# Altium PCB ART_CARD Rev 5.PcbDoc (part 13 of 13)
Units mil, origin at the board's own origin, x right, y up, seen from the top; angles counter-clockwise.
Board outline 6600.39 x 3903.54 mil, 8 copper layers (Top, Inner Layer 2, Inner Layer 3, Inner Layer 4, Inner Layer 5, Inner Layer 6, Inner Layer 7, Bottom), stack 63.111 mil thick; 542 components, 382 nets, 2410 pads, 1433 vias.
Unrouted connection lines stored in the file: 1247.
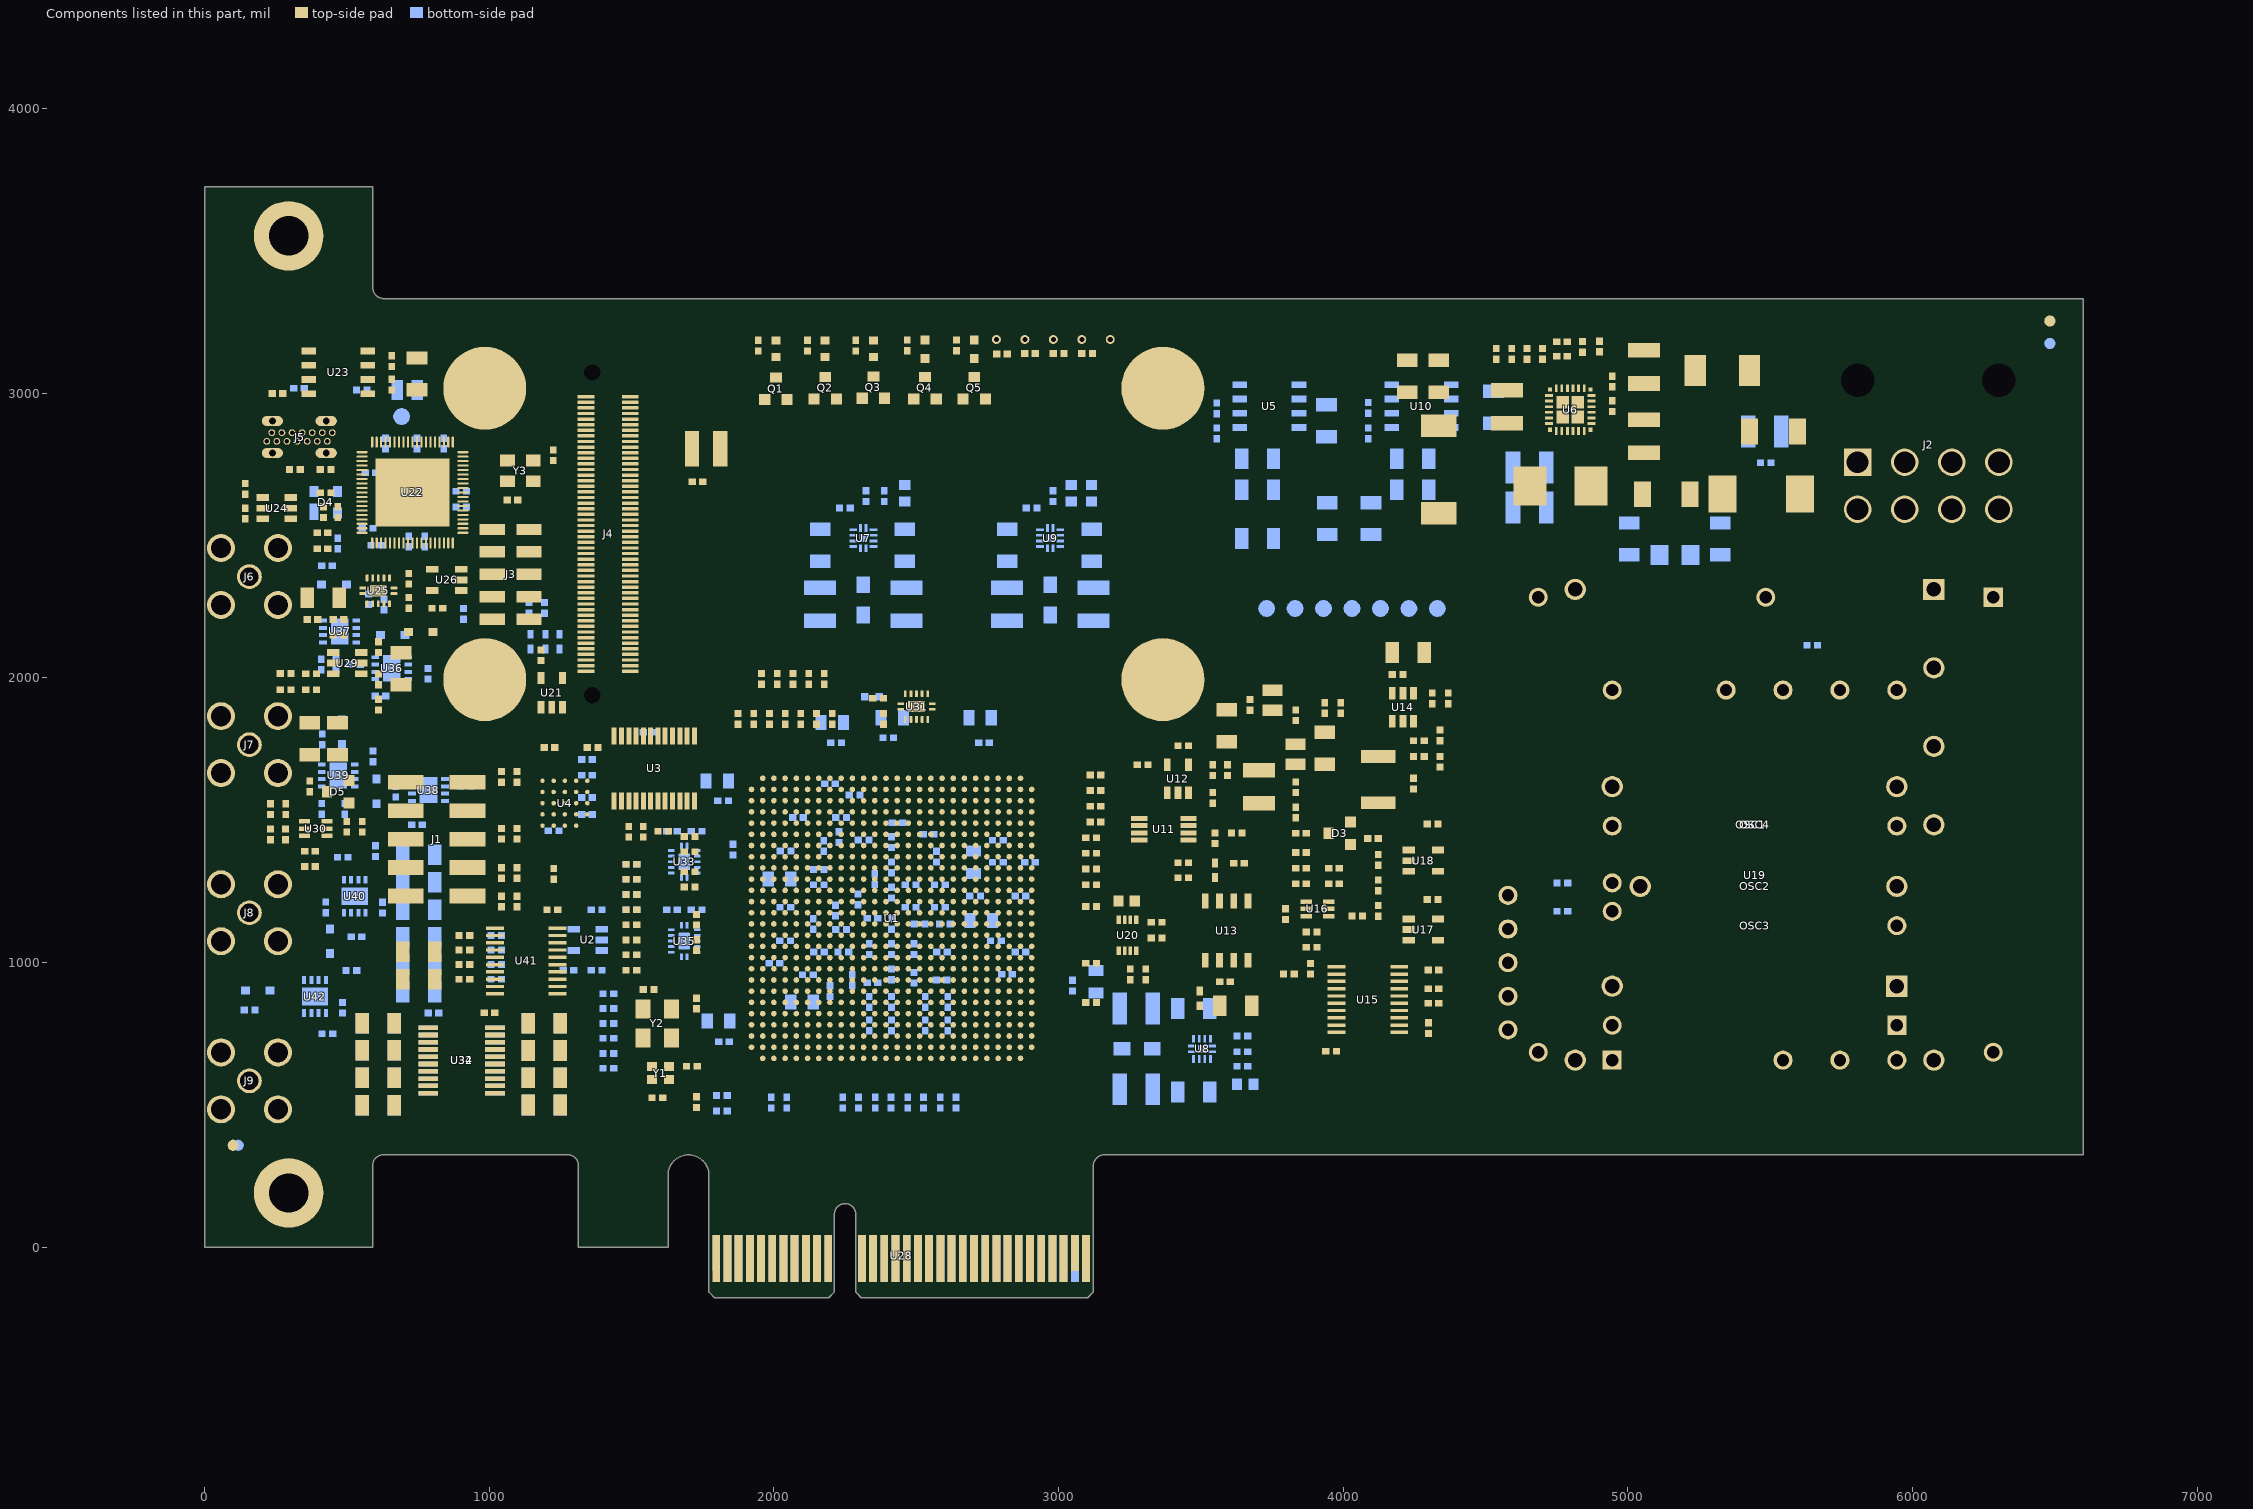
[diagram p19: the components of this part, seen from the top]

## Silkscreen, mask and mechanical layers (free items; w line width, h text height) (continued)
Drill Drawing:
  drawing of 391 lines, arcs and shapes, not listed
  text "8" at -4068.97,6617.77 h78.12
  text "7" at -2198.89,6617.77 h78.12
  text "6" at -228.61,6617.77 h78.12
  text "5" at 1736.34,6617.77 h78.12
  text "4" at 3704.85,6617.77 h78.12
  text "3" at 5675.13,6617.77 h78.12
  text "2" at 7643.63,6617.77 h78.12
  text "1" at 9529.69,6617.77 h78.12
  text "Rev" at 5053.55,6486.2 h41.67
  text "DESCRIPTION" at 6523.32,6486.2 h41.67
  text "DATE" at 8575.06,6486.2 h41.67
  text "APPROVED" at 9438.3,6486.2 h41.67
  text "NOTES:" at -4831.08,6427.62 h31.25
  text "1" at 5123.38,6330.74 h41.67
  text "1." at -4831.08,6304.92 h31.25
  text "FABRICATE BOARD PER:" at -4437.38,6304.92 h31.25
  text "Latest revision of IPC-A-600 Class 2. Electrical integrity testing required, per section 5.2 of IPC-A-600." at -4437.38,6182.21 h31.25
  text "2." at -4831.08,5936.81 h31.25
  text "MATERIAL : MUST BE \"LEAD-FREE PROCESS COMPATIBLE\"" at -4437.38,5936.81 h31.25
  text "Rigid laminate and prepeg shall be per IPC-4101/99/101/126. As described in the StackUp." at -4437.38,5814.1 h31.25
  text "F" at -5051.53,5761.47 h78.12
  text "F" at 10499.65,5761.47 h78.12
  text "Laminate must meet latest RoHS directive subject to Orolia Engineering Approval." at -4437.38,5691.4 h31.25
  text "3." at -4831.08,5445.99 h31.25
  text "FINISH : MUST BE \"LEAD-FREE PROCESS COMPATIBLE\"" at -4437.38,5445.99 h31.25
  text "ENIG (Electroless Nickel, Immersion Gold) per IPC-4552" at -4437.38,5323.29 h31.25
  text "4." at -4831.08,5077.88 h31.25
  text "SOLDER MASK : MUST BE \"LEAD-FREE PROCESS COMPATIBLE\"" at -4437.38,5077.88 h31.25
  text "LPI per IPC-SM-840 (current rev) COLOR : GREEN" at -4437.38,4955.18 h31.25
  text "Soldermask provided as 1 to 1 and shall be oversized at the fabricator as required in order to insure" at -4437.38,4832.48 h31.25
  text "that soldermask does not encroach upon thru hole and SMT pads." at -4437.38,4709.77 h31.25
  text "0.008 DIA Vias shall be plugged/tented from top and bottom side per artwork supplied unless mask" at -4437.38,4587.07 h31.25
  text "is removed by artwork. These vias are required to be filled and copper capped. It is acceptable" at -4437.38,4464.37 h31.25
  text "to use and epoxy fill after initial plating, followed by a copper cap process to cap the via fill." at -4437.38,4341.66 h31.25
  text "Continuous copper plate is required." at -4437.38,4218.96 h31.25
  text "167.65mm" at 3103.61,4064.86 h50
  text "E" at -5049.56,4019.35 h78.12
  text "E" at 10501.62,4019.35 h78.12
  text "5." at -4831.08,3973.55 h31.25
  text "SILKCREEN : MUST BE \"LEAD-FREE PROCESS COMPATIBLE\"" at -4437.38,3973.55 h31.25
  text "White (All silkscreen to be removed from any exposed plated areas)" at -4437.38,3850.85 h31.25
  text "15.00mm" at 770.55,3753.84 h50
  text "6." at -4831.08,3605.44 h31.25
  text "DIMENSIONING AND TOLERANCING PER ANSI-Y-14.5 (LATEST REV)." at -4437.38,3605.44 h31.25
  text "7." at -4831.08,3360.04 h31.25
  text "94V-0 Min is required and shall be marked on top or bottom side silkscreen or copper" at -4437.38,3360.04 h31.25
  text "8." at -4831.08,3114.63 h31.25
  text "All copper on any layer shall be trimmed back 0.015 from the board edge as required." at -4437.38,3114.63 h31.25
  text "9." at -4831.08,2869.22 h31.25
  text "All internal unused pads shall be removed" at -4437.38,2869.22 h31.25
  text "10." at -4831.08,2623.81 h31.25
  text "Teardrops shall be added where possible" at -4437.38,2623.81 h31.25
  text "11." at -4831.08,2378.41 h31.25
  text "All holes sizes shown are expected finished hole sizes after processing." at -4437.38,2378.41 h31.25
  text "12." at -4831.08,2133 h31.25
  text "This board shall be supplied in array format that shall be determined/approved by the purshaser of the bare board" at -4437.38,2133 h31.25
  text "D" at -5053.51,2050.84 h78.12
  text "D" at 10497.67,2050.84 h78.12
  text "94.65mm" at -710.53,1681.37 h50 r90
  text "99.15mm" at -828.64,1604.15 h50 r90
  text "8.25mm" at -119.98,504.8 h50 r90
  text "R1.825mm" at 1181.1,452.76 h50
  text "4.85mm" at -277.46,370.94 h50 r90
  text "8.39mm" at -434.94,333.23 h50 r90
  text "R0.95mm" at 2303.15,314.96 h50
  text "4.50mm" at -592.42,180 h50 r90
  text "C" at -5055.05,82.34 h78.12
  text "C" at 10496.13,82.34 h78.12
  text "4X45° CHAMFER" at 3267.72,-255.91 h39.37
  text "7.50mm" at -472.44,-374.02 h50
  text "15.00mm" at 157.48,-492.13 h50
  text "18.35mm" at 779.04,-509.94 h50
  text "21.20mm" at 2533.13,-509.94 h50
  text "8.00mm" at 1318.9,-610.24 h50
  text "11.20mm" at 1850.39,-610.24 h50
  text "3.65mm" at 1574.8,-708.66 h50
  text "1.90mm" at 2185.04,-708.66 h50
  text "20 degrees chamfer board edge" at 2193.11,-1483.07 h55.12
  text "for PCI Express connector" at 2312.99,-1633.86 h55.12
  text "20" at 3446.98,-1766.96 h50
  text "B" at -5052.8,-1886.17 h78.12
  text "B" at 10498.38,-1886.17 h78.12
  text "1.60mm" at 2094.69,-2290.16 h50 r90
  text "1.40mm" at 2612.54,-2648.52 h50
  text "UNLESS OTHERWISE SPECIFIED:" at 4604.38,-2860.06 h35
  text "NAME" at 6624.29,-2892.03 h32.5
  text "DATE" at 7277.43,-2892.03 h32.5
  text "OROLIA FRANCE" at 9102.9,-2892.91 h31.25
  text "DRAWN" at 6005.47,-3079.28 h32.5
  text "H ECHELARD" at 6562.29,-3079.77 h37.5
  text "03/03/2022" at 7195.79,-3080.02 h37.5
  text "PART NUMBER: ART_CARD_PCB" at 7755.94,-3090.55 h50
  text "THE INFORMATION CONTAINED IN THIS" at 6386.21,-3245.83 h27.5
  text "TITLE:" at 7679.94,-3298.52 h50
  text "DOCUMENT IS THE SOLE PROPERTY OF OROLIA." at 6266.85,-3340.2 h27.5
  text "ART_CARD" at 8706.01,-3423.78 h62.5
  text "ANY REPRODUCTION, DISCLOSURE OR" at 6394.42,-3434.57 h27.5
  text "MANUFATURE OF THIS INFORMATION IN PART OR" at 6252.86,-3528.94 h27.5
  text "AS A WHOLE WITHOUT THE WRITTEN PERMISSION" at 6255.18,-3623.31 h27.5
  text "A" at -5061.51,-3628.29 h78.12
  text "A" at 10489.67,-3628.29 h78.12
  text "MATERIAL" at 4599.31,-3660.81 h30
  text "OF OROLIA GROUP IS PROHIBITED." at 6430.67,-3717.68 h27.5
  text "PCB" at 5227.72,-3770.52 h31.25
  text "SIZE" at 7665.37,-3915.25 h50
  text "DWG.  NO." at 8059.02,-3915.25 h50
  text "REV" at 9901.61,-3917.32 h50
  text "CHANGE RESTRICTED" at 6874.62,-3925.78 h31.25
  text "ART_CARD_PCB" at 8694.92,-4007.87 h62.5
  text "FINISH" at 4600.98,-4033.09 h30
  text "NO MANUAL CHANGES" at 6853.01,-4048.49 h31.25
  text "A3" at 7785.39,-4053.69 h62.5
  text "5" at 10100.69,-4053.69 h62.5
  text "THIRD ANGLE" at 6686.15,-4179.31 h30
  text "SCALE: 1:1" at 7739.8,-4254.53 h50
  text "SHEET 1 OF 1" at 9538.32,-4254.21 h50
  text "DO NOT SCALE" at 8483.56,-4257.95 h50
  text "PROJECTION" at 6686.15,-4278.68 h30
  text "8" at -4068.97,-4484.59 h78.12
  text "7" at -2198.89,-4484.59 h78.12
  text "6" at -228.61,-4484.59 h78.12
  text "5" at 1736.34,-4484.59 h78.12
  text "4" at 3704.85,-4484.59 h78.12
  text "3" at 5675.13,-4484.59 h78.12
  text "2" at 7643.63,-4484.59 h78.12
  text "1" at 9529.69,-4484.59 h78.12